# EAGLE board rectifier-power (EAGLE 5.07)
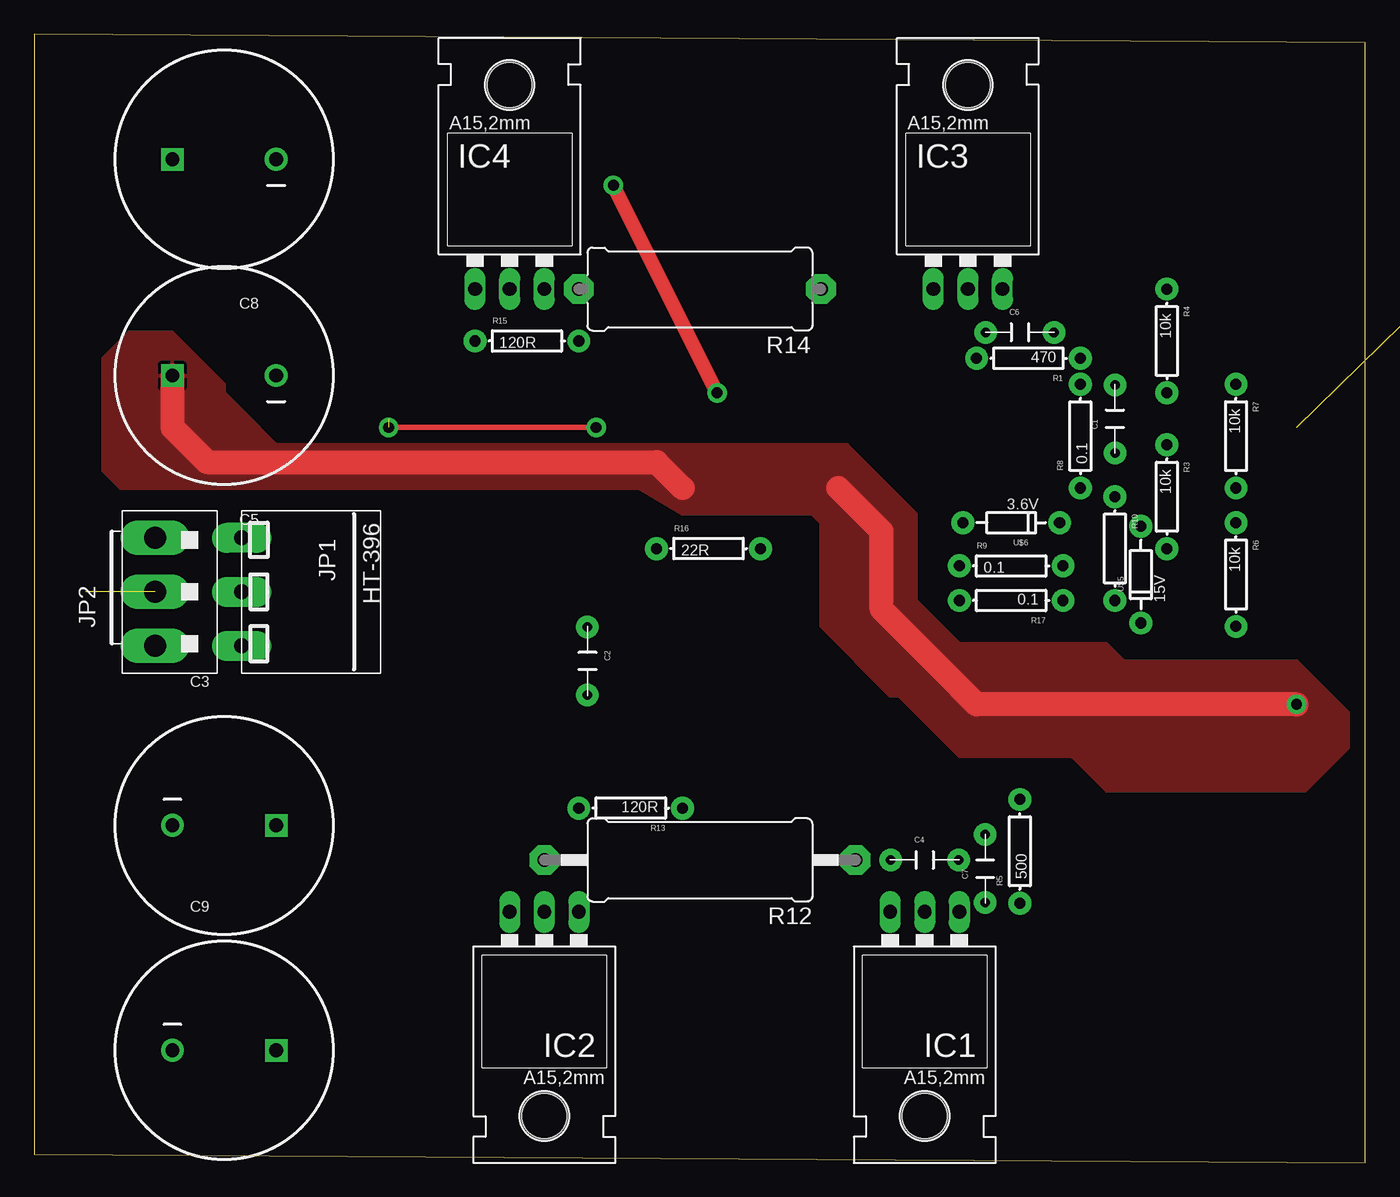
[diagram p0: board, top side]
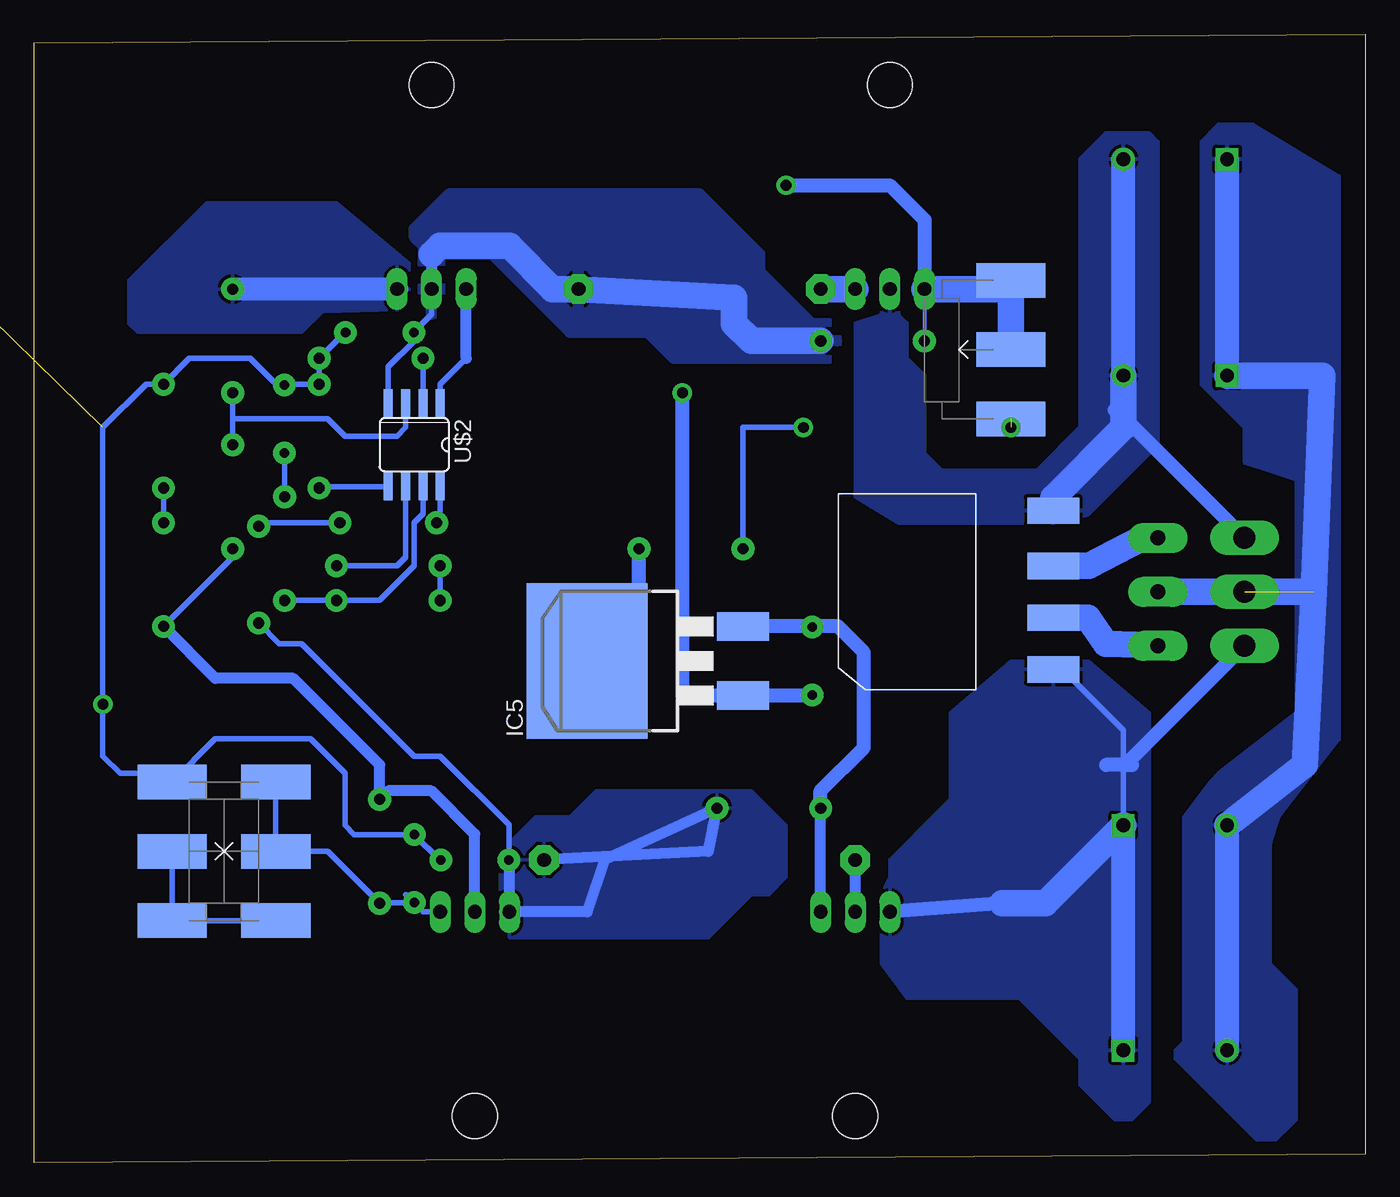
[diagram p1: board, bottom side, seen from below]

Size 97.77 x 82.86 mm. Coordinates in mm from the lower left corner, seen from the top.
Outline: 0,0.63 97.77,0 97.77,82.22 0,82.86 0,0.63
Copper layers (1*16): Top 0.035mm / dielectric 1.5mm / Bottom 0.035mm
Design rules "default": minimum track width 10mil, minimum drill 24mil, track to track 8mil, track to pad 8mil, pad to pad 8mil, via to via 8mil, smd to smd 8mil, copper to edge 40mil, drill to drill 8mil, minimum pad ring 10mil, minimum via ring 8mil, stop-mask expansion 4mil, vias tented up to drill 0mil, thermal gap 10mil

## Footprints (pad centres in the part's own frame; a part is rotated, then mirrored left to right if it is on the bottom)
CAP-PTH-5MM = drill 0.7 pad 1.651 round: 1 -2.5,0; 2 2.5,0
CPOL-RADIAL-1000UF-63V = drill 1.016 pad 1.651 square: 1 3.81,0 | drill 1.016 pad 1.676 round: 2 -3.81,0
TO220L1 = drill 1.016 long: 1 -2.54,-3.81; 2 0,-3.81; 3 2.54,-3.81 | hole 3.302: 0,11.176
337TL = drill 1.016 long: 1 -2.54,-3.81; 2 0,-3.81; 3 2.54,-3.81 | hole 3.302: 0,11.176
D2PACK = smd 2.083 x 3.81: 1 -2.54,-8.89; 3 2.54,-8.89 | smd 11.43 x 8.89: 2 0,2.54
HT-396-3 = drill 1.1 pad 2.184 long: 1 -3.96,0; 2 0,0; 3 3.96,0
VH-396-3 = drill 1.6 pad 2.54 long: 1 -3.96,0; 2 0,0; 3 3.96,0
XH-1X2-LONG-LOCK = drill 1.016 pad 1.88 long: 1 1.397,0; 2 -1.397,0
OSRAM-SIDELED = smd 4 x 4: A 0,2.5; C 0,-2.5
AXIAL-0.3 = drill 0.813 pad 1.676 round: P$1 -3.81,0; P$2 3.81,0
0617/22 = drill 1.016 pad 2.184 octagon: 1 -11.43,0; 2 11.43,0
0617/17 = drill 1.016 pad 2.184 octagon: 1 -8.89,0; 2 8.89,0
KBP310 = smd 1.93 x 3.81: + -5.7,-10.724; - 5.954,-10.724; AC1 -1.9,-10.724; AC2 1.9,-10.724
SO08 = smd 0.66 x 2.032: 1 -1.905,-3.073; 2 -0.635,-3.073; 3 0.635,-3.073; 4 1.905,-3.073; 5 1.905,3.073; 6 0.635,3.073; 7 -0.635,3.073; 8 -1.905,3.073
POT-PANNEL = smd 2.54 x 5.08: A -6.35,0; E 3.81,0; S -1.27,0
DIODE-ZENER = drill 0.813 pad 1.676 round: P$1 -3.556,0; P$2 3.556,0

## Placement (x,y rotation side)
C1  [CAP-PTH-5MM]  79.38,54.61 90 top
C2  [CAP-PTH-5MM]  40.64,36.83 270 top
C3  [CPOL-RADIAL-1000UF-63V]  13.97,24.77 0 top
C4  [CAP-PTH-5MM]  65.41,22.23 0 top
C5  [CPOL-RADIAL-1000UF-63V]  13.97,57.78 180 top
C6  [CAP-PTH-5MM]  72.39,60.96 0 top
C7  [CAP-PTH-5MM]  69.85,21.59 90 top
C8  [CPOL-RADIAL-1000UF-63V]  13.97,73.66 180 top
C9  [CPOL-RADIAL-1000UF-63V]  13.97,8.25 0 top
IC1  LM317MB  [TO220L1]  65.41,14.61 180 top
IC2  LM317MB  [TO220L1]  37.46,14.61 180 top
IC3  LM337  [337TL]  68.58,67.94 0 top
IC4  LM337  [337TL]  34.92,67.94 0 top
IC5  LM317BD2T  [D2PACK]  54.61,36.83 90 bottom
JP1  [HT-396-3]  15.24,41.91 270 top
JP2  [VH-396-3]  8.89,41.91 90 top
JP9  [XH-1X2-LONG-LOCK]  126.36,73.03 270 top  (outside the outline)
LED1  RED  [OSRAM-SIDELED]  135.89,81.28 270 top  (outside the outline)
R1  470  [AXIAL-0.3]  73.02,59.05 180 top
R2  400R  [AXIAL-0.3]  124.46,81.28 0 top  (outside the outline)
R3  10k  [AXIAL-0.3]  83.19,48.9 270 top
R4  10k  [AXIAL-0.3]  83.19,60.33 270 top
R5  500  [AXIAL-0.3]  72.39,22.86 90 top
R6  10k  [AXIAL-0.3]  88.27,43.18 270 top
R7  10k  [AXIAL-0.3]  88.27,53.34 270 top
R8  0.1  [AXIAL-0.3]  76.83,53.34 90 top
R9  0.1  [AXIAL-0.3]  71.75,43.81 0 top
R10  [AXIAL-0.3]  79.38,45.09 270 top
R12  1.2R  [0617/22]  48.89,22.23 180 top
R13  120R  [AXIAL-0.3]  43.81,26.04 180 top
R14  1.2R  [0617/17]  48.89,64.13 180 top
R15  120R  [AXIAL-0.3]  36.2,60.33 0 top
R16  22R  [AXIAL-0.3]  49.53,45.09 0 top
R17  0.1  [AXIAL-0.3]  71.75,41.27 180 top
U$1  KBP310  [KBP310]  33.66,41.91 90 bottom
U$2  TL062  [SO08]  69.85,52.7 180 bottom
U$4  1k  [POT-PANNEL]  87.63,21.59 270 bottom
U$5  15V  [DIODE-ZENER]  81.28,43.18 90 top
U$6  3.6V  [DIODE-ZENER]  71.75,46.99 180 top
V-POT  10k  [POT-PANNEL]  80.01,24.13 90 bottom
V-POT1  100R  [POT-PANNEL]  26.03,60.96 90 bottom

## Library data of the parts
C1-C9 JP1 JP2 JP9 R1-R10 R12-R17 U$1 U$2 U$4-U$6 V-POT V-POT1 = digital-toy
IC1-IC5 = v-reg
LED1 = led

## Nets
+24V: C3.1 C9.1 IC2.3 JP2.1 U$1.+
-24V: C5.2 C8.2 IC4.2 JP2.3 U$1.-
GND: C1.2 C3.2 C4.2 C5.1 C6.2 C7.2 C8.1 C9.2 JP1.2 JP2.2 R1.P$1 R2.P$1 R7.P$1 R8.P$2 U$4.A
N$1: IC1.2 R3.P$2 R5.P$2 R6.P$2
N$3: JP1.3 U$1.AC1
N$4: LED1.C R2.P$2
N$5: U$2.8 U$6.P$2
N$6: C4.1 IC1.3 R12.1 R13.P$1 U$5.P$1
N$7: JP1.1 U$1.AC2
N$8: U$5.P$2 U$6.P$1
N$9: IC2.2 R12.2
N$10: C2.1 IC2.1 IC5.3 R13.P$2
N$11: IC3.1 U$2.1
N$12: R1.P$2 U$2.2
N$14: IC3.3 R4.P$1
N$15: R8.P$1 U$2.5
N$16: R9.P$2 U$2.6
N$17: C7.1 IC1.1 R5.P$1 V-POT.E V-POT.S
N$18: U$4.E U$4.S V-POT.A
N$19: R6.P$1 R7.P$2
N$20: IC4.3 R14.2
N$21: R3.P$1 R4.P$2 U$2.3
N$22: C1.1 R10.P$1
N$23: R9.P$1 R17.P$2
N$24: C6.1 IC3.2 R14.1 R15.P$2 U$2.4
N$25: C2.2 IC4.1 IC5.1 R15.P$1 V-POT1.E V-POT1.S
N$26: IC5.2 R16.P$2
N$27: R16.P$1 V-POT1.A
N$28: R10.P$2 R17.P$1 U$2.7
VCC: LED1.A

## Tracks (layer width: path | path; a pad name or v marks a point on that pad's centre or on a via)
+24V
  Bottom 0.406: C3.1 17.78,29.21 17.78,31.75 22.23,36.2 22.92,36.2 U$1.+
  Bottom 1.016: 26.67,19.05 IC2.3 | 17.63,29.21 JP2.1 | 19.05,29.21 17.78,29.21 17.63,29.21 | 17.63,29.21 17.14,29.21
  Bottom 1.778: C9.1 C3.1
  Bottom 1.93: C3.1 23.49,19.05 26.67,19.05
  pour Bottom: 15.88,4.45 15.88,33.02 20.32,36.83 26.03,36.83 30.48,33.02 30.48,26.67 34.92,22.23 34.92,20.95 35.56,19.68 35.56,14.61 33.66,12.06 25.4,12.06 20.95,7.62 20.95,5.71 18.41,3.18 17.14,3.18
-24V
  Bottom 1.016: JP2.3 18.27,55.24 18.41,55.24
  Bottom 1.778: C5.2 C8.2
  Bottom 1.93: U$1.- 22.93,48.82 17.78,53.98 C5.2
  pour Bottom: 15.88,75.56 19.05,75.56 20.95,73.66 20.95,53.98 24.13,50.8 31.12,50.8 32.38,52.07 32.38,57.78 33.66,59.05 33.66,61.59 34.29,62.23 34.29,65.41 34.92,65.41 35.56,64.77 35.56,62.23 37.46,61.59 37.46,48.9 34.29,46.99 21.59,46.99 20.32,47.62 15.24,52.7 15.24,74.93
GND  (via drill 0.8 pad 1.42)  (2 unrouted)
  Top 1.778: C5.1 10.16,53.98 12.7,51.44 45.72,51.44 47.62,49.53 | 59.05,49.53 62.23,46.36 62.23,40.64 69.22,33.66 v92.71,33.66
  Bottom 0.406: C6.2 74.93,60.96 R1.P$1 R8.P$2 79.33,57.15 C1.2 79.97,57.11 81.91,59.05 86.36,59.05 R7.P$1 89.53,57.15 92.71,53.98 v92.71,33.66 92.71,29.84 91.44,28.57 88.27,28.57 U$4.A 84.45,31.12 77.47,31.12 74.93,28.57 74.93,24.77 74.25,24.09 C7.2 67.98,22.23 C4.2
  Bottom 1.778: C9.2 C3.2 | C5.1 C8.1
  Bottom 1.93: 3.81,41.91 JP1.2 | 3.81,41.91 4.45,29.21 C3.2 | C5.1 3.17,57.78 3.81,41.91
  pour Bottom: 10.79,28.57 11.43,27.94 13.34,25.4 13.34,8.89 13.97,8.25 13.97,7.62 7.62,1.27 6.99,1.27 5.08,3.18 5.08,12.7 6.99,14.61 6.99,24.77
  pour Bottom: 8.25,76.2 10.79,76.2 12.07,74.93 12.07,57.15 8.89,53.98 8.89,51.44 5.08,50.16 5.08,33.02 10.79,28.57 10.79,27.94 6.99,23.5 6.35,25.4 1.91,31.12 1.91,72.39
  pour Top: 6.99,60.96 10.16,60.96 13.97,57.15 13.97,56.52 17.78,52.7 59.69,52.7 60.96,50.8 60.96,48.9 59.05,47.62 47.62,47.62 44.45,49.53 6.35,49.53 5.08,50.8 5.08,59.05
  pour Top: 53.34,49.53 52.7,52.07 53.98,51.44 59.69,52.7 64.77,47.62 64.77,41.27 67.95,38.1 78.74,38.1 80.01,36.83 92.71,36.83 96.52,33.02 96.52,30.48 93.34,27.3 78.74,27.3 76.2,29.84 67.95,29.84 63.5,34.29 62.86,34.29 57.78,39.37 57.78,46.99 56.52,48.26 53.98,48.26 53.34,48.9
N$1
  Bottom 0.406: R3.P$2 83.19,44.45 R6.P$2
  Bottom 0.813: IC1.2 65.41,24.13 68.58,27.3 71.75,27.3 R5.P$2 72.39,29.21 78.74,35.56 84.45,35.56 R6.P$2
N$3
  Bottom 1.93: JP1.3 14.46,37.95 19.05,38.1 20.39,40 U$1.AC1
N$4  (1 unrouted)
N$5
  Bottom 0.406: U$2.8 67.95,47.24 U$6.P$2
N$6
  Bottom 0.406: 62.86,22.18 C4.1 62.91,24.8 67.95,29.84 69.85,29.84 78.11,38.1 79.76,38.1 U$5.P$1
  Bottom 0.813: R12.1 48.26,22.86 R13.P$1 55.88,22.23 57.15,18.41 IC1.3 62.86,22.18 62.86,22.23
  pour Bottom: 42.55,20.95 42.55,24.77 45.09,27.3 56.52,27.3 58.42,25.4 60.96,25.4 62.23,24.13 63.5,22.86 63.5,17.14 62.86,16.51 48.26,16.51 45.09,19.68 43.81,19.68
N$7
  Bottom 1.93: JP1.1 16.36,45.87 20.32,43.81 U$1.AC2
N$8
  Bottom 0.406: U$6.P$1 81.03,46.99 U$5.P$2
N$9
  Bottom 0.813: IC2.2 R12.2
N$10
  Bottom 0.813: IC2.1 R13.P$2
  Bottom 1.016: IC5.3 40.68,39.37 C2.1 40.6,39.37 38.73,39.37 36.83,37.47 36.83,30.48 40,27.3 R13.P$2
N$11
  Bottom 0.406: 66.04,59.05 67.95,57.15 U$2.1
  Bottom 0.813: 66.04,59.05 IC3.1
N$12
  Bottom 0.406: U$2.2 R1.P$2
N$14
  Bottom 1.676: IC3.3 R4.P$1
  pour Bottom: 70.23,63.12 70.23,66.04 75.56,70.48 85.09,70.48 90.8,64.77 90.8,61.59 90.17,60.96 78.11,60.96 76.58,62.48 71.12,62.61
N$15
  Bottom 0.406: U$2.5 76.73,49.63 R8.P$1
N$16
  Bottom 0.406: R9.P$2 71.12,43.81 70.48,44.45 U$2.6
N$17
  Bottom 0.406: IC1.1 69.22,18.41 70.48,19.68 70.44,19.68 C7.1 72.35,19.09 R5.P$1 76.2,22.86 V-POT.S V-POT.E
N$18
  Bottom 0.406: V-POT.A U$4.E U$4.S
N$19
  Bottom 0.406: R6.P$1 R7.P$2
N$20
  Bottom 1.93: IC4.3 R14.2
N$21
  Bottom 0.406: 83.19,54.61 R3.P$1 83.19,52.07 | 83.19,54.61 R4.P$2 | U$2.3 70.48,53.98 71.12,53.34 74.93,53.34 76.2,54.61 83.19,54.61
N$22
  Bottom 0.406: R10.P$1 C1.1
N$23
  Bottom 0.406: R17.P$2 R9.P$1
N$24
  Bottom 0.406: IC3.2 68.58,62.27 C6.1 69.89,60.28 71.75,58.42 U$2.4
  Bottom 0.813: 68.58,66.67 IC3.2
  Bottom 1.93: R15.P$2 45.09,60.33 46.35,61.59 46.35,63.5 R14.1 59.69,64.13 62.86,67.31 67.95,67.31 68.58,66.67
  pour Bottom: 39.37,61.59 40.64,61.59 44.45,65.41 44.45,66.67 48.89,71.12 67.31,71.12 69.85,68.58 69.85,67.94 69.22,67.31 69.22,62.87 68.58,62.23 67.95,62.87 67.95,66.67 64.14,66.67 58.42,60.96 52.7,60.96 50.8,59.05 39.37,59.05 38.73,60.33
N$25  (via drill 0.8 pad 1.42)
  Top 1.016: v50.16,56.52 v42.55,71.75
  Bottom 0.305: IC4.1 R15.P$1
  Bottom 1.016: C2.2 40.68,34.29 IC5.1 50.16,34.29 v50.16,56.52 | v42.55,71.75 34.92,71.75 32.38,69.22 IC4.1
  Bottom 1.93: IC4.1 26.67,64.13 V-POT1.E V-POT1.S
N$26
  Bottom 1.016: R16.P$2 53.34,40.64 IC5.2
N$27  (via drill 0.8 pad 1.42)  (1 unrouted)
  Top 0.406: v26.03,53.98 v41.27,53.98
  Bottom 0.406: R16.P$1 45.72,53.98 v41.27,53.98
N$28
  Bottom 0.406: U$2.7 69.22,47.62 69.85,46.99 69.85,43.81 72.39,41.27 R17.P$1 R10.P$2